# Altium PCB MB1296-STM32_LRA_Disco_revC01.PcbDoc (part 1 of 3)
Units mm, origin at the board's own origin, x right, y up, seen from the top; angles counter-clockwise.
Board outline 65.06 x 95.02 mm, 4 copper layers (Top Layer, GND, VCC, Bottom Layer), stack 1.037 mm thick; 180 components, 129 nets, 710 pads, 1005 vias.
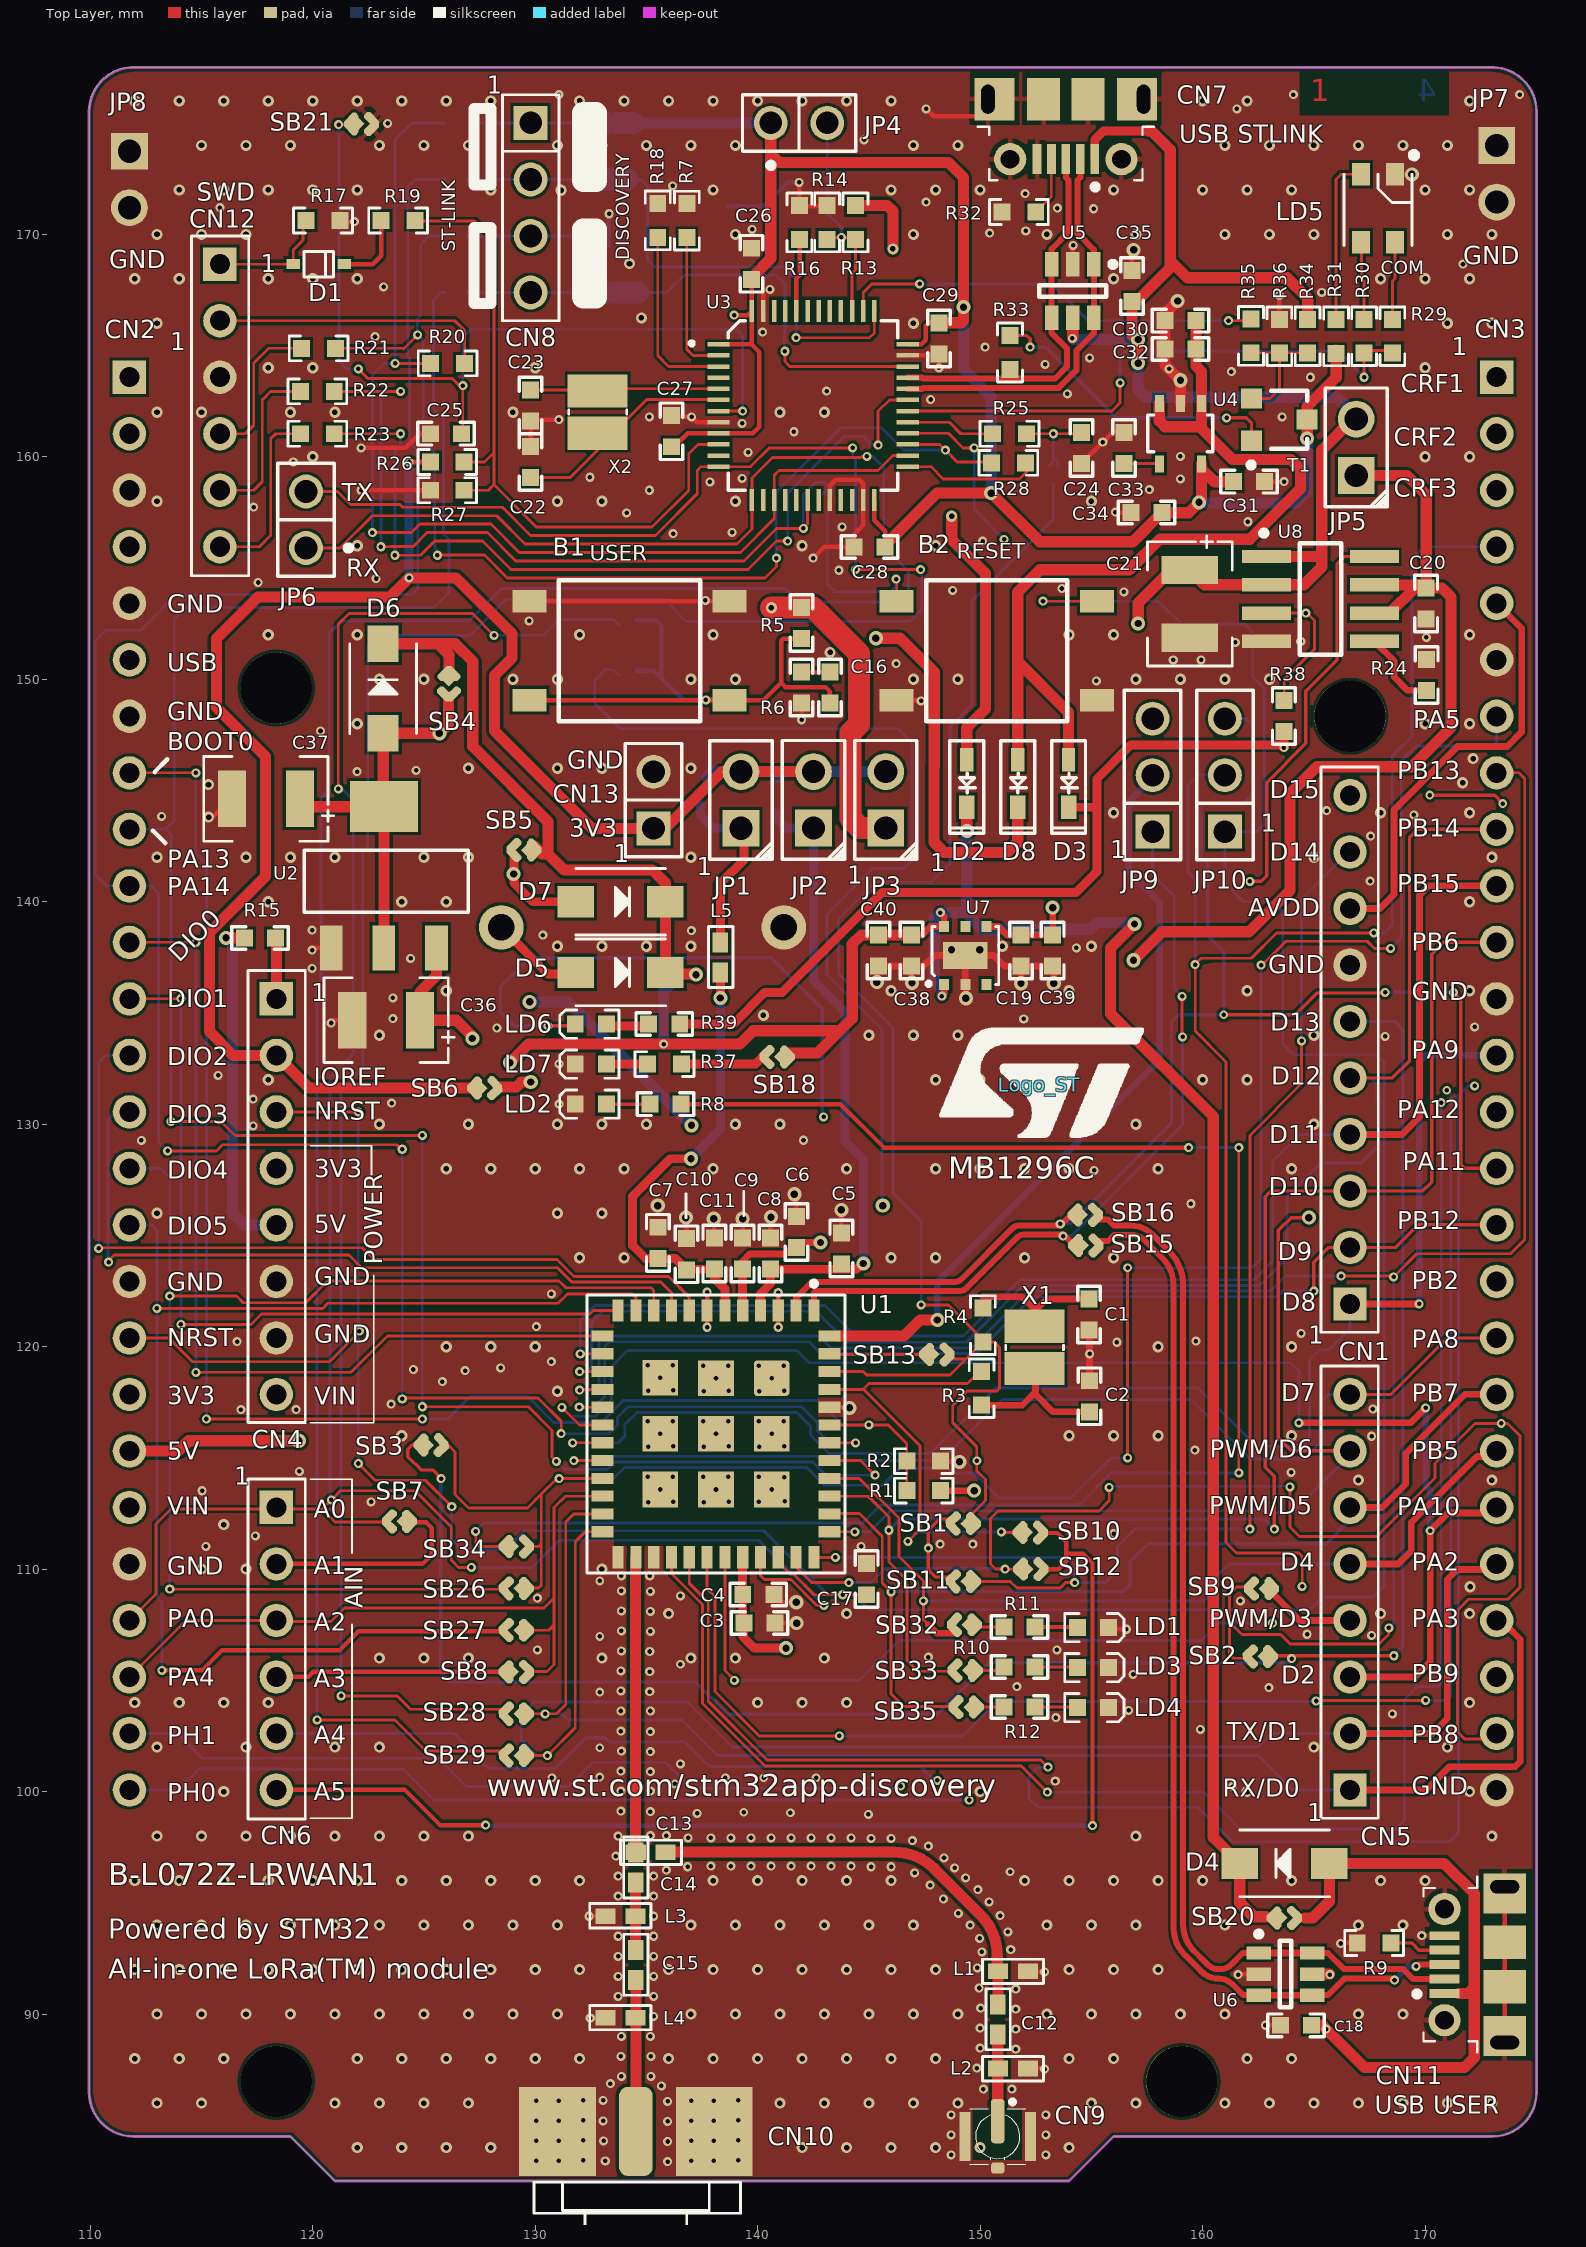
[diagram p0: Top Layer view]
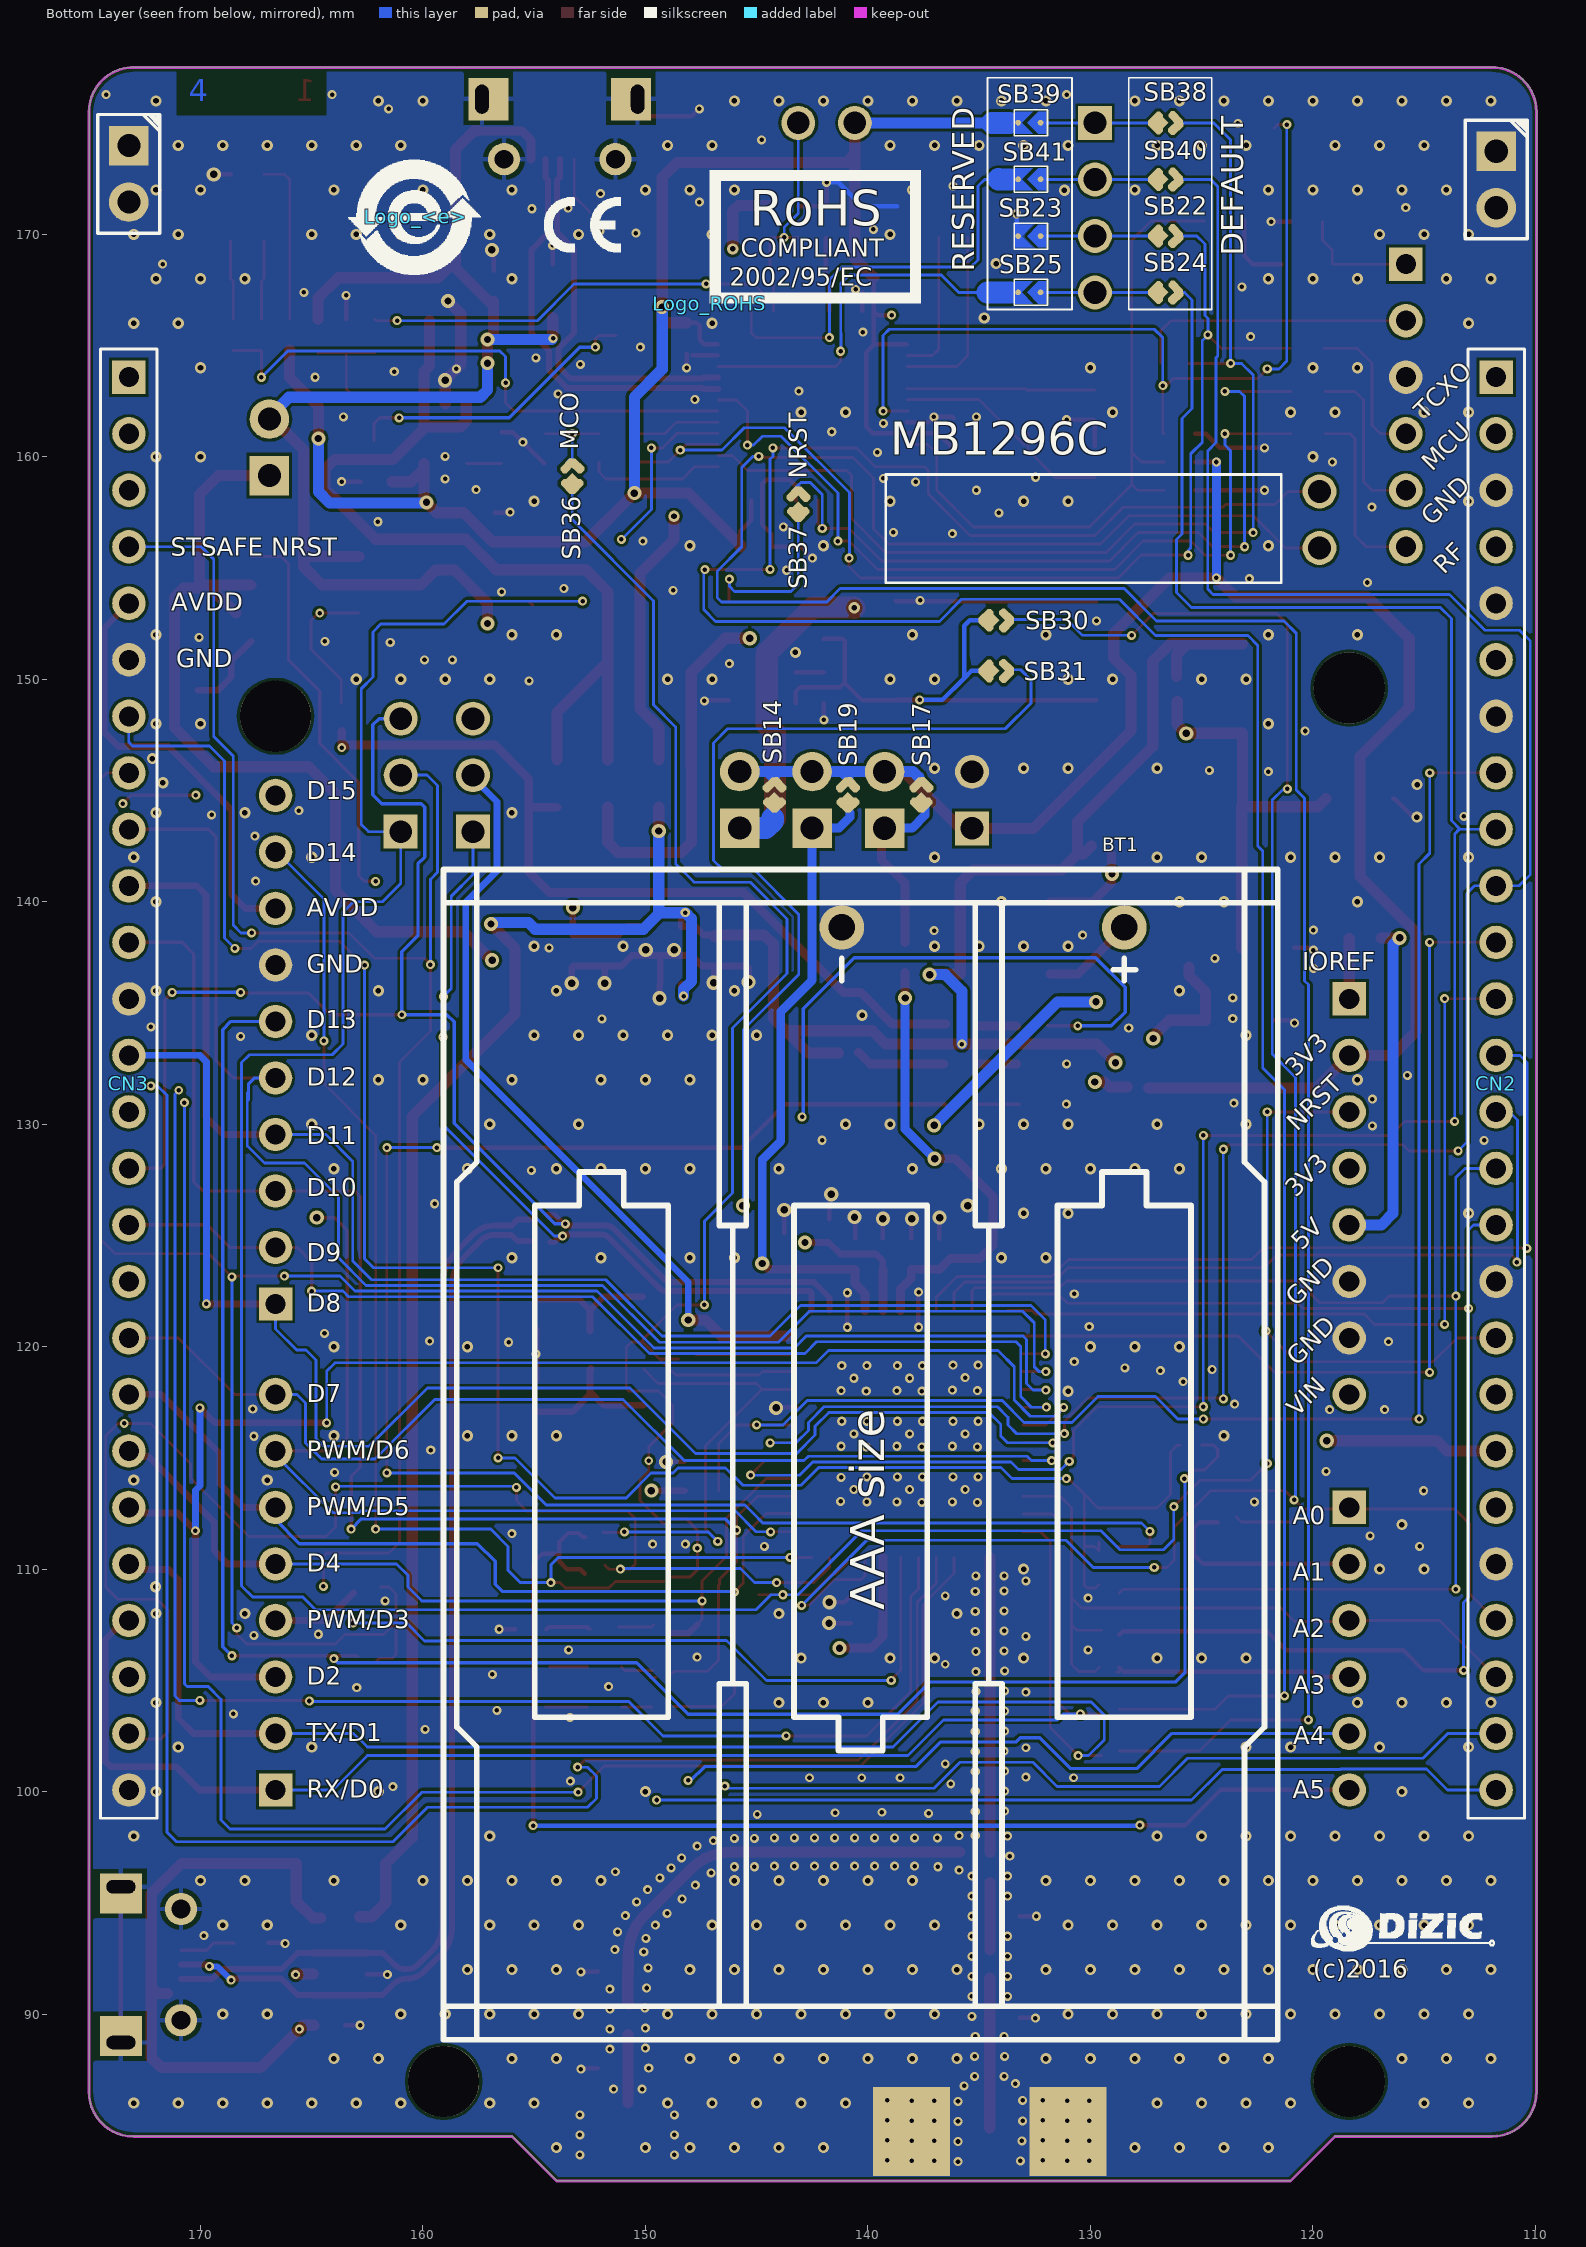
[diagram p1: Bottom Layer view, seen from below]
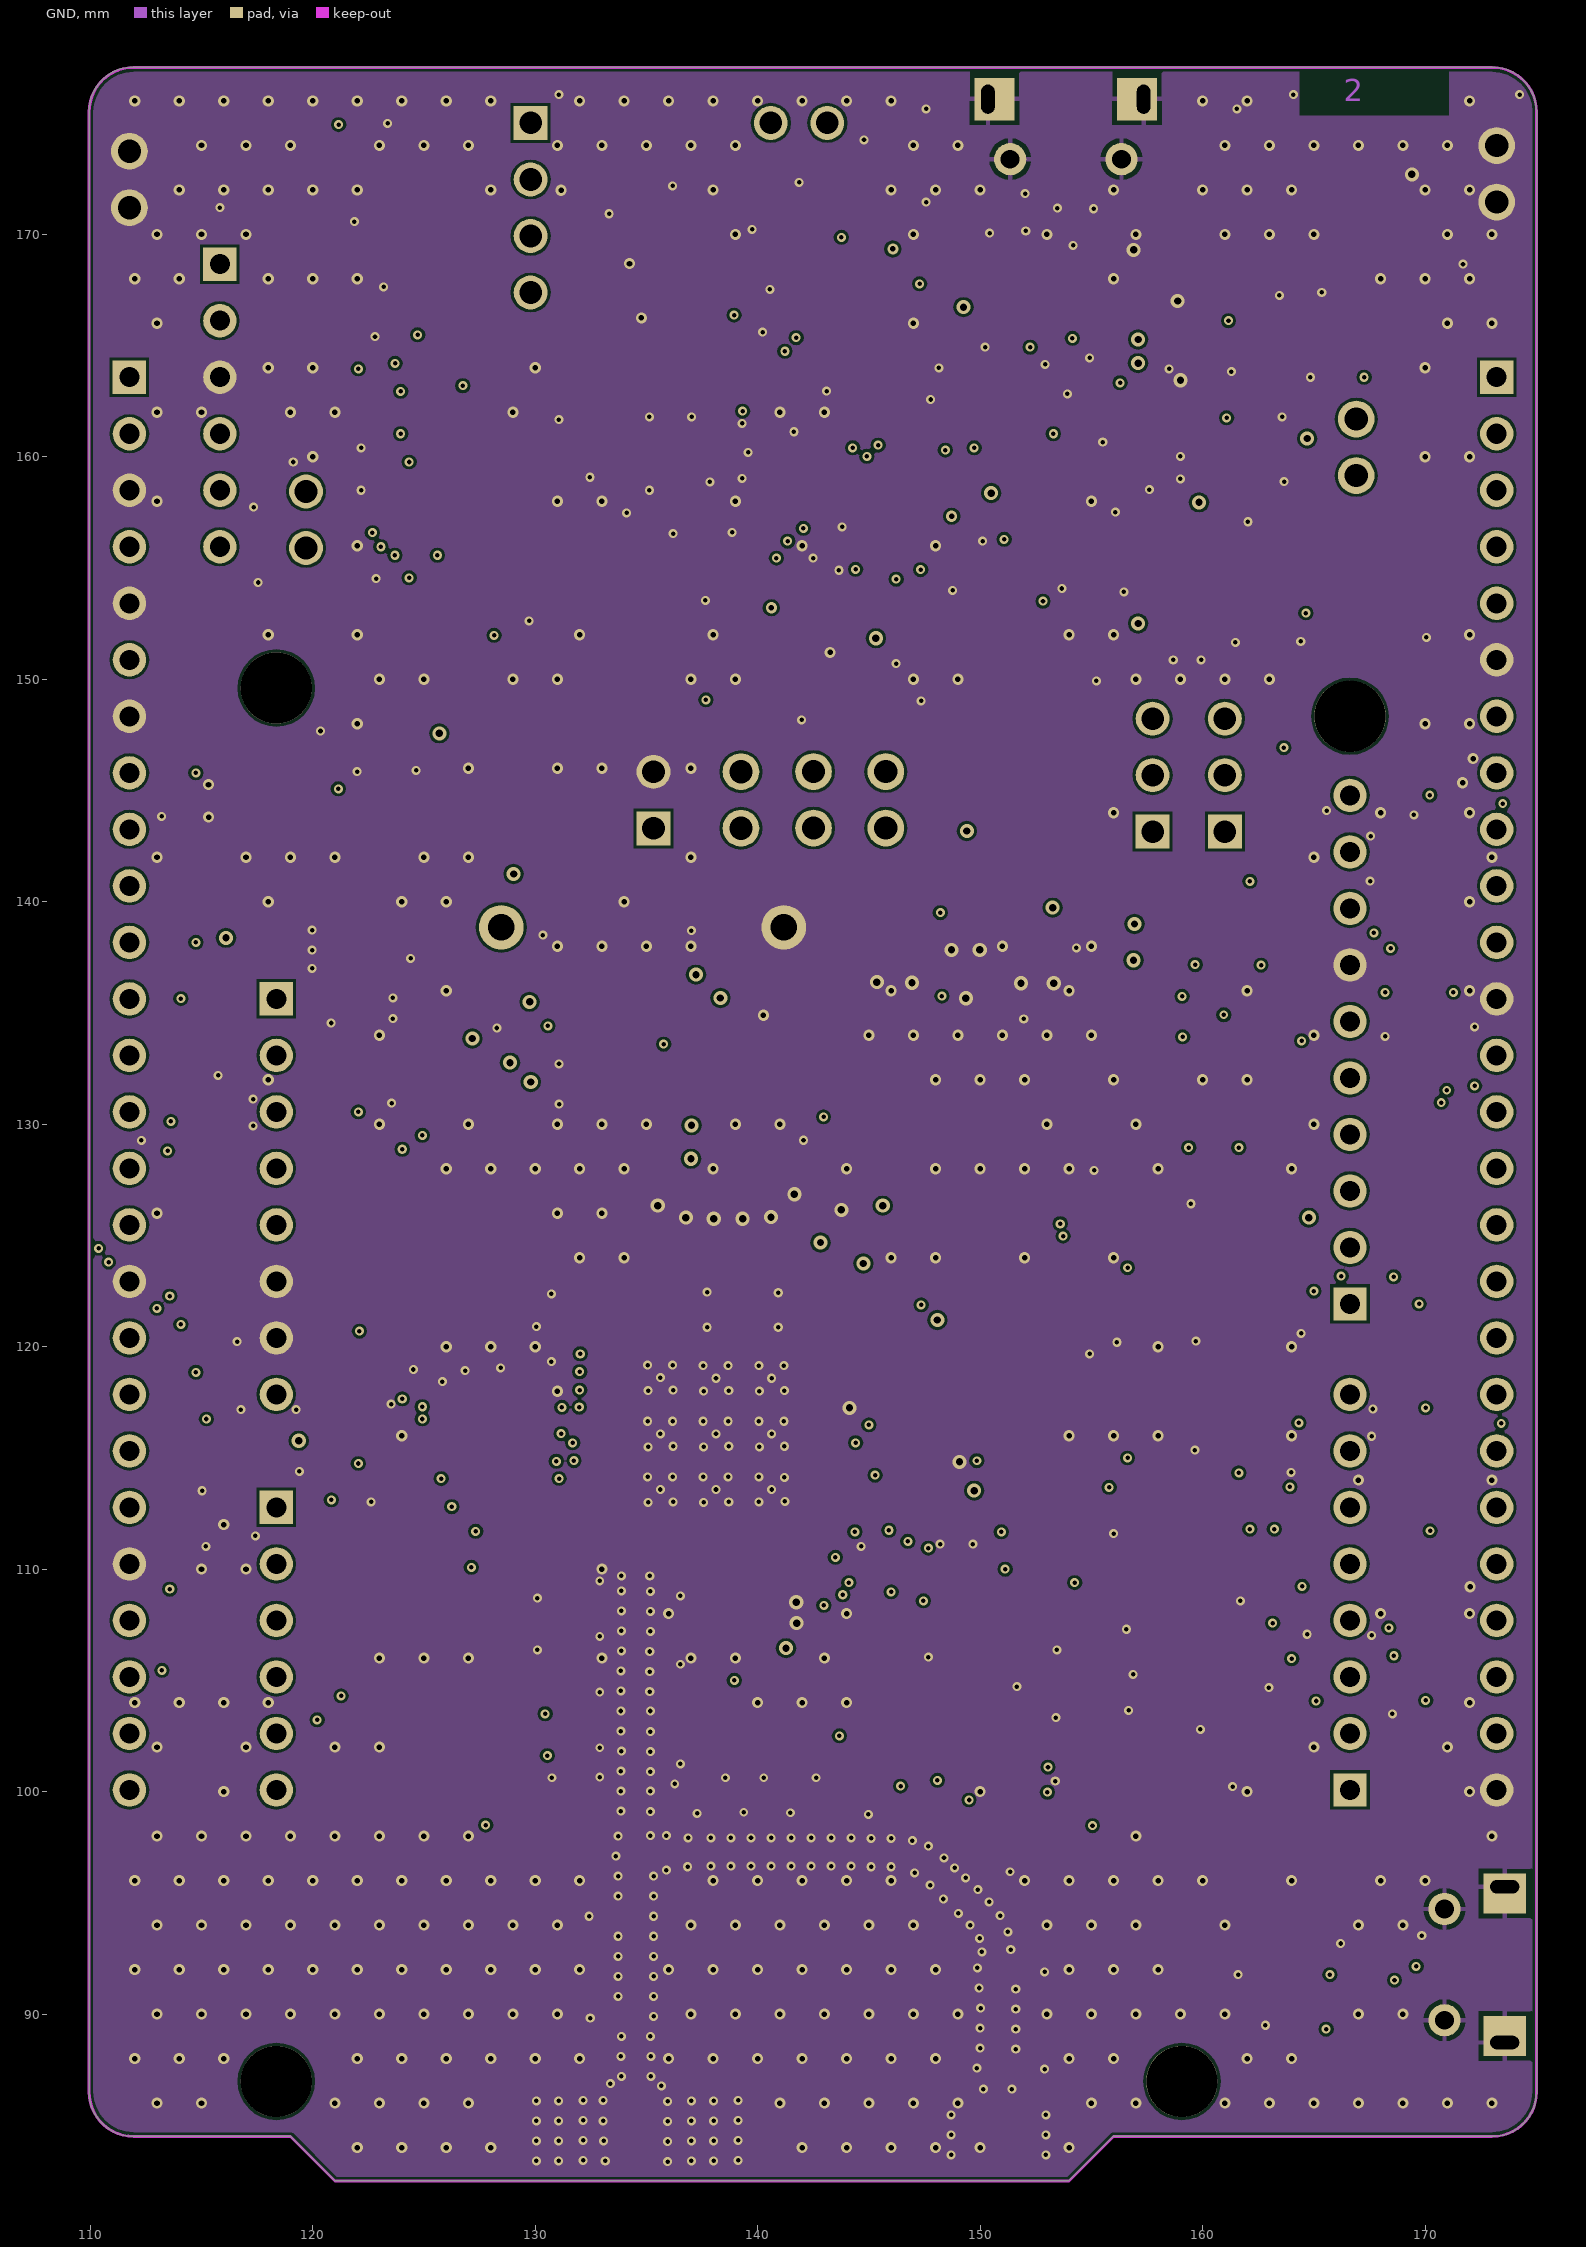
[diagram p2: GND]
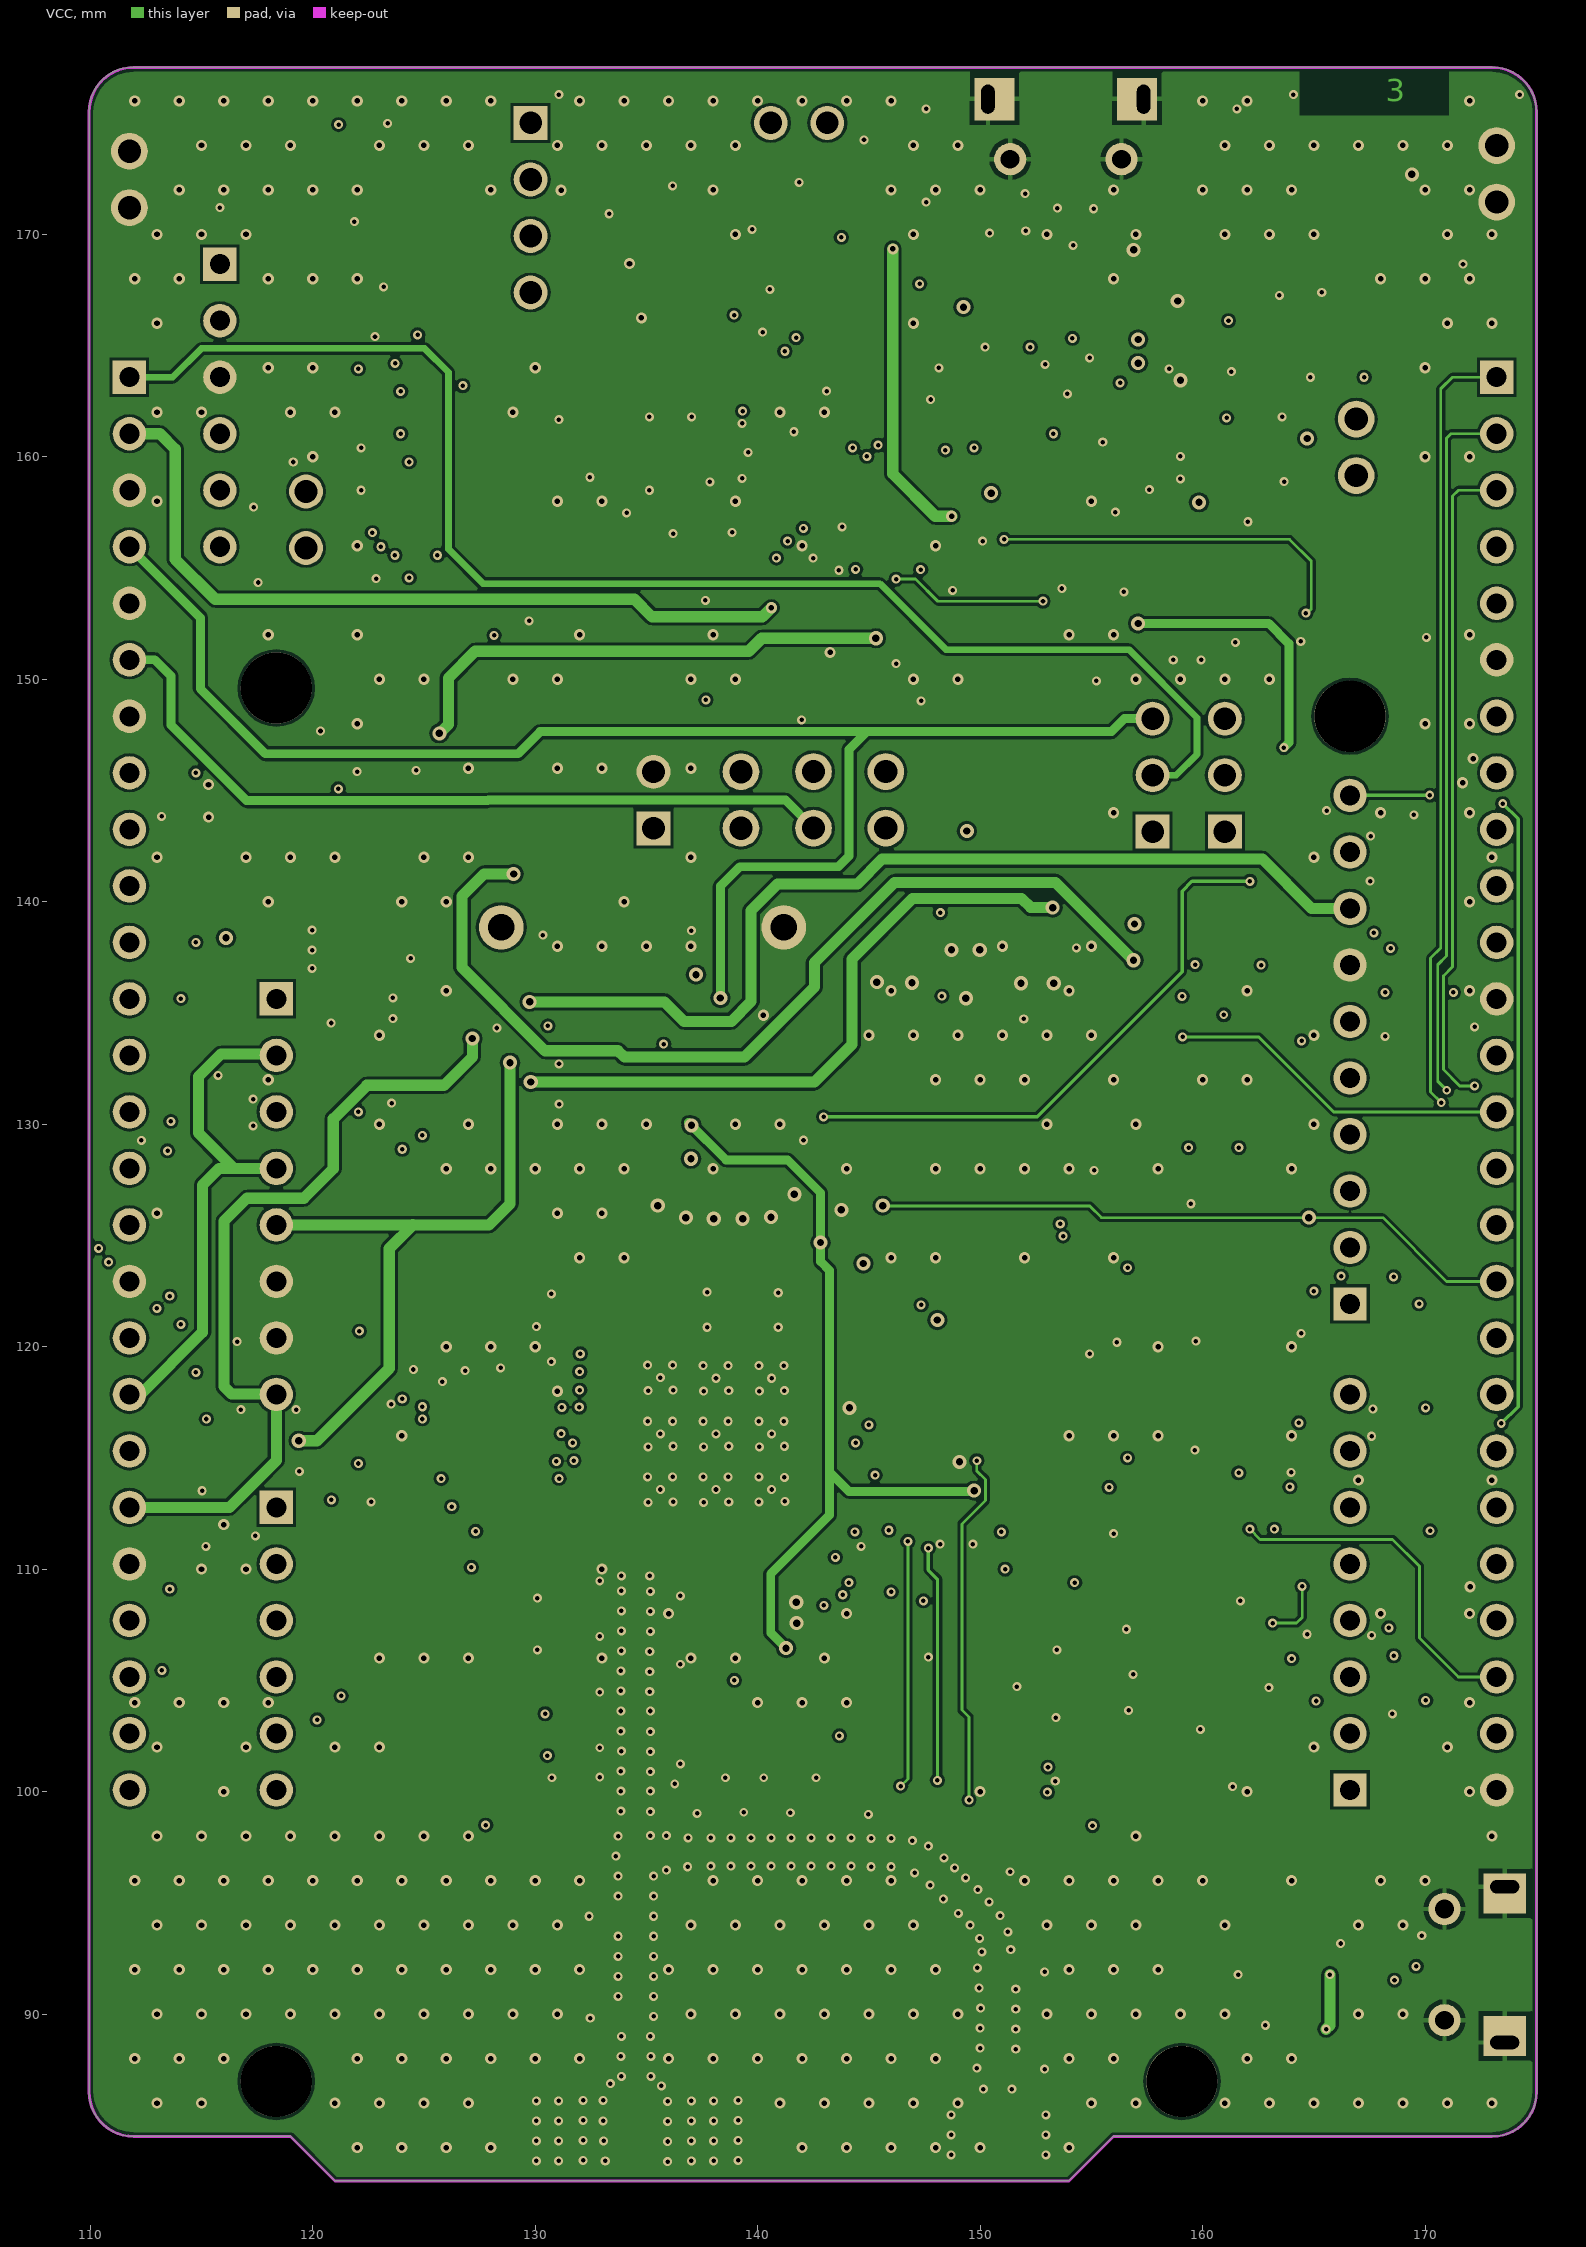
[diagram p3: VCC]

## Layer stack, top to bottom
Top Layer: signal copper 0.0356
Dielectric: core 0.254, FR-4, Dk 4.2
GND: signal copper 0.036
Dielectric: prepreg 0.32, FR-4, Dk 4.8
VCC: signal copper 0.036
Dielectric: core 0.32, FR-4, Dk 4.8
Bottom Layer: signal copper 0.0356

## Board outline
121.005,82.5 119.005,84.5 117.85,84.5 111.955,84.5 cw(c111.955,86.51) 109.945,86.51 109.945,175.515 cw(c111.95,175.515) 111.95,177.52 172.99,177.52 cw(c172.99,175.5) 175.01,175.5 175.01,86.499 cw(c173.011,86.499) 173.011,84.5 156.13,84.5 155.975,84.5 153.975,82.5 121.005,82.5

## Design rules (kind name [scope] priority, off if disabled: settings)
Clearance "Schematic Clearance Constraint" [InNetClass('50R')] p1: gap=0.157
Clearance Clearance_CN10 [InComponent('CN10') vs OnLayer('Keep-Out Layer')] p2: gap=0.08
Clearance [All] p3: gap=0.127
ComponentClearance [All] p1: gap=0 collisioncheckmode=3 verticalgap=0 showdistances=FALSE
DiffPairsRouting [All] p1: maxlimit=0.147 minlimit=0.147 mostfreqgap=0.147 maxuncoupledlength=12.7
HoleSize [All] p1: absolutevalues=TRUE maxlimit=4 minlimit=0.025 maxpercent=80.000 minpercent=20.000
MinimumSolderMaskSliver MinimumSolderMaskSliver_SB [HasFootprint('JP2_SMD') or InComponent('U1') or InComponent('U3') or InComponent('CN11') or InComponent('CN16') or InComponent('CN9')] p1: minsoldermaskwidth=0
MinimumSolderMaskSliver [All] p2: minsoldermaskwidth=0.1
PlaneClearance [All] p1: clearance=0.21
PlaneConnect [All] p1: planeconnectstyle=Direct reliefexpansion=0.21 reliefentries=4 reliefconductorwidth=0.21 reliefairgap=0.21
PolygonConnect [HasFootprint('Molex_1050170001') or InComponent('SB21') or InComponent('SB43')] p1: connectstyle=Relief reliefconductorwidth=0.21 reliefentries=4 polygonreliefangle="90 Angle" airgapwidth=0.21
PolygonConnect PolygonConnect_1 [All] p2: connectstyle=Direct reliefconductorwidth=0.254 reliefentries=4 polygonreliefangle="90 Angle" airgapwidth=0.254
RoutingVias [All] p1: holewidth=0.3 width=0.6 viastyle="Through Hole" minholewidth=0.2 minwidth=0.4 maxholewidth=0.7 maxwidth=1.27
SilkToSilkClearance [All] p1: silktosilkclearance=0.08
SilkToSolderMaskClearance [IsPad] p1: minsilkscreentomaskgap=0 clearancetoexposedcopper=TRUE
SolderMaskExpansion [All] p1: expansion=0.102
Width [All] p1: maxlimit=3 minlimit=0.12 preferedwidth=0.254
20 further rules are at their usual default settings.

## Classes and differential pairs
net class 50R: ANT NetC12_1 NetC12_2 NetC14_2 NetC15_2
component class MB1296-STLINK: C22 C23 C24 C25 C26 C27 C28 C29 C30 C31 C32 C33 C34 C35 CN7 CN8 CN12 D1 D2 D3 D8 JP4 JP6 JP7 JP8 LD5 R7 R13 R14 R16 R17 R18 R19 R20 R21 R22 R23 R25 R26 R27 R28 R29 R30 R31 R32 R33 R34 R35 R36 SB21 SB22 SB23 SB24 SB25 SB36 SB37 SB38 SB39 SB40 SB41 T1 U3 U4 U5 X2
component class MB1296-USB_Antenna: B1 B2 C12 C13 C14 C15 C16 C17 C18 CN9 CN10 CN11 L1 L2 L3 L4 LD1 LD2 LD3 LD4 R5 R6 R8 R9 R10 R11 R12 SB30 SB31 SB32 SB33 SB34 SB35 U6
component class MB1296-LRA_Module: C1 C2 C3 C4 C5 C6 C7 C8 C9 C10 C11 JP9 JP10 R1 R2 R3 R4 SB13 SB15 SB16 SB26 SB27 SB28 SB29 U1 X1
component class MB1296-Connectors: CN1 CN2 CN3 CN4 CN5 CN6 R15 SB1 SB2 SB3 SB7 SB8 SB9 SB10 SB11 SB12
component class MB1296-Power: BT1 C19 C20 C21 C36 C37 C38 C39 C40 CN13 D4 D5 D6 D7 JP1 JP2 JP3 JP5 L5 LD6 LD7 R24 R37 R38 R39 SB4 SB5 SB6 SB14 SB17 SB18 SB19 SB20 U2 U7 U8
net class SX1276_DIO[0..5]: SX1276_DIO0 SX1276_DIO1 SX1276_DIO2 SX1276_DIO3 SX1276_DIO4 SX1276_DIO5
net class PH[0..1]: PH0 PH1
net class PC[0..15]: PC0 PC1 PC2 PC3 PC4 PC5 PC6 PC7 PC8 PC9 PC10 PC11 PC12 PC13 PC14 PC15
net class PB[0..15]: PB0 PB1 PB2 PB3 PB4 PB5 PB6 PB7 PB8 PB9 PB10 PB11 PB12 PB13 PB14 PB15
net class PA[0..15]: PA0 PA1 PA2 PA3 PA4 PA5 PA6 PA7 PA8 PA9 PA10 PA11 PA12 PA13 PA14 PA15
net class CRF[1..3]: CRF1 CRF2 CRF3
differential pair LRA_USB: +LRA_USB_P -LRA_USB_N
differential pair USB_STLK: +"USB_STLK _P" -"USB_STLK _N"

## Components (designator, comment, footprint, x,y, rotation, side; value= is the part's Value field where it differs from the comment)
B1 "USER (Blue)" PB10 134.239,151.286 r180 top locked
B2 "Reset (Black)" PB10 150.749,151.286 r0 top locked
BT1 "3 x AAA Battery Holder" "3 X AAA BATTERY HOLDER" 128.475,138.85 r90 bottom locked
C1 "20 pF" 0603C 154.892,121.446 r90 top
C2 "20 pF" 0603C 154.917,117.771 r270 top
C3 "1uF" 0603C 140.075,107.575 r0 top
C4 "100nF" 0603C 140.027,108.856 r0 top
C5 "10µF" 0603C 143.76,124.41 r270 top
C6 "10µF" 0603C 141.74,125.15 r270 top
C7 "10µF" 0603C 135.51,124.67 r270 top
C8 "100nF" 0603C 140.577,124.181 r90 top
C9 "100nF" 0603C 139.327,124.181 r90 top
C10 "1uF" 0603C 136.802,124.156 r90 top
C11 "100nF" 0603C 138.052,124.181 r90 top
C12 "" 0402 150.791,90.432 r270 top
C13 "" 0402 135.866,97.282 r180 top
C14 "" 0402 134.516,97.257 r270 top
C15 "" 0402 134.516,92.882 r270 top
C16 "100nF" 0603C 143.25,149.625 r90 top
C17 "100nF" 0603C 144.9,109.55 r90 top
C18 "100nF" 0603C 164.2,89.5 r180 top
C19 "100nF" 0603C 151.835,137.81 r270 top
C20 "100nF" 0603C 170.05,153.41 r270 top
C21 "4.7uF(25V)" TAN-B 159.425,153.385 r270 top
C22 "20 pF" 0603C 129.794,159.766 r270 top
C23 "20 pF" 0603C 129.794,162.306 r90 top
C24 "100nF" 0603C 154.559,160.401 r90 top
C25 "100nF" 0603C 125.984,161.036 r180 top
C26 "100nF" 0603C 139.725,168.675 r90 top
C27 "100nF" 0603C 136.125,161.15 r90 top
C28 "100nF" 0603C 145.025,155.95 r180 top
C29 "100nF" 0603C 148.15,165.325 r270 top
C30 "1uF_X5R_0603" 0603C 159.004,166.116 r180 top
C31 "1uF_X5R_0603" 0603C 162.09,158.88 r0 top
C32 "100nF" 0603C 159.004,164.846 r180 top
C33 "10nF_X7R_0603" 0603C 156.464,160.401 r90 top
C34 "100nF" 0603C 157.48,157.49 r180 top
C35 "100nF" 0603C 156.825,167.675 r90 top
C36 "10uF(25V)" TAN-B 123.3,134.675 r180 top
C37 "10uF(25V)" TAN-B 117.9,144.625 r180 top
C38 "1uF_X5R_0603" 0603C 146.91,137.81 r270 top
C39 "1uF_X5R_0603" 0603C 153.26,137.81 r270 top
C40 "100nF" 0603C 145.435,137.81 r270 top
CN1 "Header 10X1_Female" "Header 1x10 Female (Wrapping)" 166.624,121.92 r180 top locked
CN2 "" "HEADER 1X26 (2.54) MALE" 111.76,163.576 r180 bottom locked
CN3 "" "HEADER 1X26 (2.54) MALE" 173.22,163.576 r180 bottom locked
CN4 "Header 8X1_Female" "Header 1x8Female (Wrapping)" 118.364,135.636 r0 top locked
CN5 "Header 8X1_Female" "Header 1x8Female (Wrapping)" 166.624,100.076 r180 top locked
CN6 "Header 6X1_Female" "Header 1x6 Female (Wrapping)" 118.364,112.776 r0 top
CN7 "1050170001" Molex_1050170001 153.85,173.375 r180 top
CN8 "Header 4" SIP4 129.794,175.006 r270 top
CN9 "U.FL-R-SMT" UFL-SMD 150.791,84.507 r0 top
CN10 "SMA" SMA_COMBO_B 134.525,87.65 r90 top
CN11 "1050170001" Molex_1050170001 170.875,92.225 r90 top
CN12 "Header 6X1" "Header 1x6 Female (Wrapping)" 115.824,168.656 r0 top
CN13 "External 3V3" SIP2 135.32,143.3 r90 top
D1 "BAT60JFILM" SOD323/A#1 120.269,168.656 r180 top
D2 "BAT60JFILM" SOD323/A#2 149.403,144.247 r90 top
D3 "BAT60JFILM" SOD323/A#2 153.975,144.247 r90 top
D4 "STPS2L30A" SMA 165.7,96.775 r90 top
D5 "STPS2L30A" SMA 131.825,136.825 r270 top
D6 "STPS2L30A" SMA 123.165,147.567 r0 top
D7 "STPS2L30A" SMA 131.825,140 r270 top
D8 "BAT60JFILM" SOD323/A#2 151.689,144.247 r90 top
JP1 "VDD_RF_LRA" SIP2/2.54#1 139.25,144.575 r180 top
JP2 "VDD_USB_LRA" SIP2/2.54#1 142.51,144.58 r180 top locked
JP3 "VDD_MCU_LRA" SIP2/2.54#1 145.76,144.58 r180 top
JP4 "" SIP2/2.54#2 140.589,175.006 r0 top
JP5 "USB_CHARGER" SIP2/2.54#1 166.903,160.426 r180 top
JP6 "" SIP2/2.54#2 119.7,155.9 r90 top
JP7 "" SIP2/2.54-BOT 173.22,172.72 r0 top
JP8 "" SIP2/2.54-BOT 111.76,172.466 r0 top
JP9 "TCXO Selection" SIP3 157.75,143.15 r90 top
JP10 "RESET source selection" SIP3 161,143.15 r90 top
L1 "" 0402 152.141,91.932 r180 top
L2 "" 0402 152.141,87.557 r180 top
L3 "" 0402 133.166,94.407 r0 top
L4 "" 0402 133.166,89.832 r0 top
L5 "BLM15HG102SN1D" 0402 138.325,138.175 r270 top
LD1 "Green" 0603D 155.075,107.375 r0 top
LD2 "Red" 0603D 132.5,130.9 r180 top
LD3 "Blue" 0603D 155.075,105.575 r0 top
LD4 "Red" 0603D 155.075,103.775 r0 top
LD5 "LD_BICOLOR_CMS" "LED SMD HSMF-A201-A00J1" 168.644,172.696 r180 top
LD6 "Red" 0603D 132.5,134.5 r180 top
LD7 "Red" 0603D 132.5,132.7 r180 top
Logo_<e> "Comment" SYMBOL_RoHS_China 160.32,170.8 r180 bottom
Logo_ROHS "Comment" SYMBOL_RoHS 147.11,166.89 r180 bottom
Logo_ST "Comment" LOGO_ST_Size3 152.65,131.78 r0 top
R1 "0R_0603" 0603 146.703,113.531 r0 top
R2 "100K" 0603 148.227,114.856 r180 top
R3 "0R_0603" 0603 150.07,117.37 r90 top
R4 "0R_0603" 0603 150.12,121.73 r270 top
R5 "4K7" 0603R 141.975,152.525 r270 top
R6 "100R" 0603R 141.975,149.625 r90 top
R7 "10K" 0603 136.814,169.853 r90 top
R8 "510R" 0603R 135.85,130.9 r0 top
R9 "100K" 0603 166.95,93.2 r0 top
R10 "680R" 0603R 151.775,105.6 r180 top
R11 "510R" 0603R 151.775,107.4 r180 top
R12 "680R" 0603R 151.775,103.8 r180 top
R13 "2K7" 0603 144.4,171.3 r270 top
R14 "4K7" 0603 143.125,169.775 r90 top
R15 "10K" 0603R 117.625,138.375 r180 top
R16 "100K" 0603 141.875,169.775 r90 top
R17 "10K" 0603 121.225,170.625 r180 top
R18 "10K" 0603 135.509,169.862 r90 top
R19 "100" 0603 124.6,170.625 r180 top
R20 "22" 0603 125.3,164.2 r0 top
R21 "22" 0603 121.025,164.875 r180 top
R22 "22" 0603 120.968,162.941 r180 top
R23 "22" 0603 120.968,161.036 r180 top
R24 "2K2" 0603R 170.07,150.2 r270 top
R25 "100" 0603 152.082,161.036 r180 top
R26 "4K7" 0603 125.285,159.766 r0 top
R27 "4K7" 0603 125.285,158.496 r0 top
R28 "100" 0603 152.03,159.73 r180 top
R29 "100" 0603 168.529,166.179 r270 top
R30 "100" 0603 167.259,166.179 r270 top
R31 "0" 0603 166,166.175 r270 top
R32 "100K" 0603 150.975,171 r0 top
R33 "1K5" 0603 151.339,165.451 r270 top
R34 "10K" 0603 164.719,166.179 r270 top
R35 "100" 0603 162.175,166.2 r270 top
R36 "36K" 0603 163.449,166.179 r270 top
R37 "1K_5%_0603" 0603 135.05,132.7 r0 top
R38 "10K" 0603R 163.65,148.35 r90 top
R39 "1K" 0603R 135.8,134.5 r180 top
SB1 "Circuit Breaker" JP2_SMD 149.248,112.047 r0 top
SB2 "Circuit Breaker" JP2_SMD 162.6,106.075 r0 top
SB3 "Circuit Breaker" JP2_SMD 125.32,115.58 r180 top
SB4 "Circuit Breaker" JP2_SMD 126.125,149.8 r90 top
SB5 "Circuit Breaker" JP2_SMD 129.5,142.325 r0 top
SB6 "Circuit Breaker" JP2_SMD 127.725,131.625 r180 top
SB7 "Circuit Breaker" JP2_SMD 123.9,112.15 r0 top
SB8 "Circuit Breaker" JP2_SMD 129.15,105.385 r180 top
SB9 "Circuit Breaker" JP2_SMD 162.65,109.125 r0 top
SB10 "Circuit Breaker" JP2_SMD 152.25,111.65 r180 top
SB11 "Circuit Breaker" JP2_SMD 149.248,109.447 r0 top
SB12 "Circuit Breaker" JP2_SMD 152.275,110 r180 top
SB13 "Circuit Breaker" JP2_SMD 148.052,119.656 r180 top
SB14 "Circuit Breaker" JP2_SMD 144.2,144.8 r270 bottom
SB15 "Circuit Breaker" JP2_SMD 154.75,124.55 r180 top
SB16 "Circuit Breaker" JP2_SMD 154.725,125.925 r180 top
SB17 "Circuit Breaker" JP2_SMD 137.6,144.8 r270 bottom
SB18 "Circuit Breaker" JP2_SMD 140.875,133.025 r0 top
SB19 "Circuit Breaker" JP2_SMD 140.9,144.8 r270 bottom
SB20 "Circuit Breaker" JP2_SMD 163.675,94.325 r180 top
SB21 "Circuit Breaker" JP2_SMD 122.19,174.96 r180 top
SB22 "Circuit Breaker" JP2_SMD 126.619,169.926 r0 bottom
SB23 "Circuit Breaker" SB-tiny 132.74,169.92 r0 bottom
SB24 "Circuit Breaker" JP2_SMD 126.619,167.386 r0 bottom
SB25 "Circuit Breaker" SB-tiny 132.74,167.39 r0 bottom
SB26 "Circuit Breaker" JP2_SMD 129.157,109.135 r0 top
SB27 "Circuit Breaker" JP2_SMD 129.157,107.257 r0 top
SB28 "Circuit Breaker" JP2_SMD 129.157,103.5 r0 top
SB29 "Circuit Breaker" JP2_SMD 129.157,101.622 r0 top
SB30 "Circuit Breaker" JP2_SMD 134.225,152.65 r0 bottom
SB31 "Circuit Breaker" JP2_SMD 134.225,150.375 r0 bottom
SB32 "Circuit Breaker" JP2_SMD 149.3,107.5 r0 top
SB33 "Circuit Breaker" JP2_SMD 149.325,105.45 r0 top
SB34 "Circuit Breaker" JP2_SMD 129.15,111.02 r180 top
SB35 "Circuit Breaker" JP2_SMD 149.375,103.8 r0 top
SB36 "Circuit Breaker" JP2_SMD 153.289,159.131 r270 bottom
SB37 "Circuit Breaker" JP2_SMD 143.129,157.861 r270 bottom
SB38 "Circuit Breaker" JP2_SMD 126.619,175.006 r0 bottom
SB39 "Circuit Breaker" SB-tiny 132.74,175.02 r0 bottom
SB40 "Circuit Breaker" JP2_SMD 126.619,172.466 r0 bottom
SB41 "Circuit Breaker" SB-tiny 132.74,172.47 r0 bottom
T1 "9013" SOT-23 163.449,161.671 r270 top
U1 "LRA Module ES0" "Lora Module ES0" 142.527,121.631 r270 top locked
U2 "LD1117S50TR" SOT-223 123.2,141.1 r270 top
U3 "STM32F103CBT6" "QFP48 7X7" 142.494,162.306 r270 top locked
U4 "LD3985M33R" SOT-23-5L 159.004,161.036 r270 top
U5 "USBLC6-2SC6" SOT23-6L 154.164,167.451 r270 top
U6 "USBLC6-2SC6" SOT23-6L 163.725,91.8 r0 top
U7 "LD39050PU33R" DFN6(3X3) 149.335,137.585 r0 top
U8 "ST890CDR" SOIC8_1R27_4R9X6 165.3,153.61 r0 top
X1 "NU/8MHz(12pF)" CRY_NX3225GD_2P 152.45,119.97 r270 top
X2 "8MHz(12pF)" CRY_NX3225GD_2P 132.81,162.01 r90 top

## Footprints (in the part's own frame and the unit in brackets; to place one, negate y for a bottom-side part, rotate by r counter-clockwise, add the part's x,y. Pads: shape width x height; smd on the part's side, far side on the other; paste and mask are expansions set on the pad)
"3 X AAA BATTERY HOLDER" [mm]
  round 2 hole 1.2: 1(0,0) 2(0,12.7)
  silkscreen extent -50,-6.9 2.6,30.6
0402 [mm]
  rect 0.9x0.7 smd: 1(0,0) 2(1.346,0)
  silkscreen extent -0.71,-0.53 2.03,0.56
0603 [mil]
  rect 30x30 smd: 1(0,0) 2(60,0)
  silkscreen extent -22,-22 82,22
0603C [mil]
  rect 30x30 smd: 1(27.5,0) 2(-27.5,0)
  silkscreen extent -50,-20 50,20
0603D [mil]
  rect 30x30 smd: A(-27.5,0) K(27.5,0)
  silkscreen extent -50,-25 55,25
0603R [mil]
  rect 30x30 smd: 1(27.5,0) 2(-27.5,0)
  silkscreen extent -50,-20 50,20
CRY_NX3225GD_2P [mm]
  rect 1.5x2.7 smd mask+0.05: 1(-0.95,0) 2(0.95,0)
  silkscreen extent -0.1,-1.3 0.1,1.3, body extent -1.65,-1.3 1.65,1.3, height 1
DFN6(3X3) [mm]
  rect 2x1.2 smd: 0(0,0)
  rect 0.45x0.5 smd: 1(-0.95,-1.3) 2(0,-1.3) 3(0.95,-1.3) 4(0.95,1.3) 5(0,1.3) 6(-0.95,1.3)
  silkscreen extent -1.71,-1.33 1.5,1.3
"Header 1x6 Female (Wrapping)" [mm] "Header 1x6 Female (Wrapping)"
  rect 1.5x1.5 hole 0.9: 1(0,0)
  round 1.5 hole 0.9: 2(0,-2.54) 3(0,-5.08) 4(0,-7.62) 5(0,-10.16) 6(0,-12.7)
  silkscreen extent -1.27,-14 1.3,1.27
"Header 1x8Female (Wrapping)" [mm] "Header 1x8 Female (Wrapping)"
  rect 1.5x1.5 hole 0.9: 1(0,0)
  round 1.5 hole 0.9: 2(0,-2.54) 3(0,-5.08) 4(0,-7.62) 5(0,-10.16) 6(0,-12.7) 7(0,-15.24) 8(0,-17.78)
  silkscreen extent -1.27,-19.05 1.3,1.27
"Header 1x10 Female (Wrapping)" [mm] "Header 1x10 Female (Wrapping)"
  rect 1.5x1.5 hole 0.9: 1(0,0)
  round 1.5 hole 0.9: 2(0,-2.54) 3(0,-5.08) 4(0,-7.62) 5(0,-10.16) 6(0,-12.7) 7(0,-15.24) 8(0,-17.78) 9(0,-20.32) 10(0,-22.86)
  silkscreen extent -1.27,-24.13 1.3,1.27
"HEADER 1X26 (2.54) MALE" [mm] "Header 1x26 (2.54)  Male Male long pins"
  rect 1.5x1.5 hole 0.9: 1(0,0)
  round 1.5 hole 0.9: 2(0,-2.54) 3(0,-5.08) 4(0,-7.62) 5(0,-10.16) 6(0,-12.7) 7(0,-15.24) 8(0,-17.78) 9(0,-20.32) 10(0,-22.86) 11(0,-25.4) 12(0,-27.94) 13(0,-30.48) 14(0,-33.02) 15(0,-35.56) 16(0,-38.1) 17(0,-40.64) 18(0,-43.18) 19(0,-45.72) 20(0,-48.26) 21(0,-50.8) 22(0,-53.34) 23(0,-55.88) 24(0,-58.42) 25(0,-60.96) 26(0,-63.5)
  silkscreen extent -1.27,-64.77 1.27,1.27
JP2_SMD [mil]
  oct 15x30 smd rot 45: 1(-18,-8) 2(18,7)
  oct 15.75x30 smd rot 135: 1(-18,8)
  rect 26x26 smd rot 45: 2(13,0)
  oct 15x30 smd rot 135: 2(18,-7)
"LED SMD HSMF-A201-A00J1" [mm]
  rect 0.8x1 smd: 1(0,0) 2(0,3.048) 3(1.524,3.048) 4(1.524,0)
  silkscreen extent -0.76,0 2.29,3.2
LOGO_ST_Size3 [mm]
  silkscreen extent -4.5,-2.36 4.7,2.57
"Lora Module ES0" [mm]
  rect 1x0.5 smd: 1(0,0) 2(0,-0.8) 3(0,-1.6) 4(0,-2.4) 5(0,-3.2) 6(0,-4) 7(0,-4.8) 8(0,-5.6) 9(0,-6.4) 10(0,-7.2) 11(0,-8) 12(0,-8.8) 25(11.1,-8.8) 26(11.1,-8) 27(11.1,-7.2) 28(11.1,-6.4) 29(11.1,-5.6) 30(11.1,-4.8) 31(11.1,-4) 32(11.1,-3.2) 33(11.1,-2.4) 34(11.1,-1.6) 35(11.1,-0.8) 36(11.1,0)
  rect 0.5x1 smd: 13(1.15,-9.5) 14(1.95,-9.5) 15(2.75,-9.5) 16(3.55,-9.5) 17(4.35,-9.5) 18(5.15,-9.5) 19(5.95,-9.5) 20(6.75,-9.5) 21(7.55,-9.5) 22(8.35,-9.5) 23(9.15,-9.5) 24(9.95,-9.5) 37(9.95,0.7) 38(9.15,0.7) 39(8.35,0.7) 40(7.55,0.7) 41(6.75,0.7) 42(5.95,0.7) 43(5.15,0.7) 44(4.35,0.7) 45(3.55,0.7) 46(2.75,0.7) 47(1.95,0.7) 48(1.15,0.7)
  rrect20% 1.6x1.6 smd: 49(3.05,-1.9)
  rect 1.6x1.6 smd: 50(5.55,-1.9) 51(8.05,-1.9) 52(3.05,-4.4) 53(5.55,-4.4) 54(8.05,-4.4) 55(3.025,-6.9) 56(5.55,-6.9) 57(8.05,-6.9)
  silkscreen extent -1.3,-10.2 11.8,1.4
Molex_1050170001 [mm]
  rect 0.4x1.35 smd: 1(-1.3,0) 2(-0.65,0) 3(0,0) 4(0.65,0) 5(1.3,0)
  round 1.45 hole 0.85: 6(-2.5,0) 11(2.5,0)
  rect 1.8x1.9 hole 0.6 slot 1.3 at 90 deg copper offset 0.3,0: 7(-3.5,-2.7)
  rect 1.5x1.9 smd: 8(-1,-2.7) 9(1,-2.7)
  rect 1.8x1.9 hole 0.6 slot 1.3 at 90 deg copper offset -0.3,0: 10(3.5,-2.7)
  silkscreen extent -3.95,-1.46 3.95,1.37, body extent -4.1,-5.21 4.1,0.19, height 2.58
PB10 [mil]
  rect 60x40 smd: 1(-177.17,-87.5) 2(-177.17,87.5) 3(177.17,87.5) 4(177.17,-87.5)
  silkscreen extent -125,-125 125,125
"QFP48 7X7" [mm]
  rect 0.2x1 smd: 1(-2.75,-4.25) 2(-2.25,-4.25) 3(-1.75,-4.25) 4(-1.25,-4.25) 5(-0.75,-4.25) 6(-0.25,-4.25) 7(0.25,-4.25) 8(0.75,-4.25) 9(1.25,-4.25) 10(1.75,-4.25) 11(2.25,-4.25) 12(2.75,-4.25) 25(2.75,4.25) 26(2.25,4.25) 27(1.75,4.25) 28(1.25,4.25) 29(0.75,4.25) 30(0.25,4.25) 31(-0.25,4.25) 32(-0.75,4.25) 33(-1.25,4.25) 34(-1.75,4.25) 35(-2.25,4.25) 36(-2.75,4.25)
  rect 1x0.2 smd: 13(4.25,-2.75) 14(4.25,-2.25) 15(4.25,-1.75) 16(4.25,-1.25) 17(4.25,-0.75) 18(4.25,-0.25) 19(4.25,0.25) 20(4.25,0.75) 21(4.25,1.25) 22(4.25,1.75) 23(4.25,2.25) 24(4.25,2.75) 37(-4.25,2.75) 38(-4.25,2.25) 39(-4.25,1.75) 40(-4.25,1.25) 41(-4.25,0.75) 42(-4.25,0.25) 43(-4.25,-0.25) 44(-4.25,-0.75) 45(-4.25,-1.25) 46(-4.25,-1.75) 47(-4.25,-2.25) 48(-4.25,-2.75)
  silkscreen extent -3.81,-5.52 3.81,3.81
SB-tiny [mil] "Pad no components"
  round 10 smd paste-10 mask+0.04: 1(-19.69,0)
  round 10 smd paste-10.08 mask+0.04: 2(20,0)
  Top Layer region: -30,-19.69 -30,19.68 -15.75,19.68 3.94,0 -15.75,-19.69
  Top Layer region: -5.91,19.68 13.78,0 -5.91,-19.69 25,-19.69 25,19.68
  silkscreen extent -32,-23 27,23
SIP2 [mil]
  rect 60x60 hole 40: 1(0,0)
  round 60 hole 40: 2(100,0)
  silkscreen extent -50,-50 150,50
SIP2/2.54#1 [mil]
  rect 65x65 / inner round 65 / far side rect 70x70 hole 41: 1(0,50)
  round 65 / inner round 65 / far side round 70 hole 41: 2(0,-50)
  silkscreen extent -55,-105 55,105
SIP2/2.54#2 [mil]
  round 60 hole 40: 1(0,0) 2(100,0)
  silkscreen extent -50,-80 150,50
SIP2/2.54-BOT [mil]
  rect 65x65 / inner round 65 / far side rect 70x70 hole 41: 1(0,50)
  round 65 / inner round 65 / far side round 70 hole 41: 2(0,-50)
SIP3 [mil]
  rect 60x60 hole 40: 1(0,0)
  round 60 hole 40: 2(100,0) 3(200,0)
  silkscreen extent -50,-50 250,50
SIP4 [mil]
  rect 60x60 hole 40: 1(0,0)
  round 60 hole 40: 2(100,0) 3(200,0) 4(300,0)
  silkscreen extent -50,-50 350,50
SMA [mm]
  rect 1.4x1.64 smd: 1(0,0) 2(0,4.03)
  silkscreen extent -1.5,0 1.5,4.03
SMA_COMBO_B [mm]
  rrect50% 4x1.5 smd: 1(-2.921,0)
  rect 4x2 smd: 2(-2.921,4.25) 2(-2.921,-2.794) 2(-2.921,2.794) 2(-2.921,-4.25)
  rect 4x2 smd far side: 2(-2.921,4.25) 2(-2.921,-2.794) 2(-2.921,2.794) 2(-2.921,-4.25)
  silkscreen extent -14.6,-4.7 -5.21,4.57
SOD323/A#1 [mm]
  rect 0.6x0.45 smd: 1(1.143,0) 2(-1.143,0)
  silkscreen extent -0.67,-0.57 0.67,0.57
SOD323/A#2 [mm]
  rect 1.06x0.7 smd: 1(0,0)
  rect 1.06x0.6 smd: 2(2.14,0)
  silkscreen extent -1.17,-0.76 3,0.76
SOIC8_1R27_4R9X6 [mm] "1.2 A current limited high-side power switch with thermal shutdown"
  rect 2.2x0.6 smd: 1(-2.425,1.905) 2(-2.425,0.635) 3(-2.425,-0.635) 4(-2.425,-1.905) 5(2.425,-1.905) 6(2.425,-0.635) 7(2.425,0.635) 8(2.425,1.905)
  silkscreen extent -2.67,-2.5 0.93,3.08, body extent -2,-2.5 2,2.5, height 1.45
SOT23-6L [mm]
  rect 1.1x0.6 smd: 1(-1.2,0.95) 2(-1.2,0) 3(-1.2,-0.95) 4(1.2,-0.95) 5(1.2,0) 6(1.2,0.95)
  silkscreen extent -1.32,-1.5 0.25,1.93, body extent -0.86,-1.51 0.87,1.52, height 1.25
SOT-23 [mm]
  rect 0.9x0.95 smd: 1(-0.95,-1.25) 2(0.95,-1.25) 3(0,1.25)
  silkscreen extent -1.3,-1.39 2.16,1.25
SOT-23-5L [mil]
  rect 30x16 smd: 1(-53.15,37.4) 2(-53.15,0) 3(-53.15,-37.4) 4(53.15,-37.4) 5(53.15,37.4)
  silkscreen extent -33,-58 32,57
SOT-223 [mil]
  rect 80x40 smd: 1(125,-93) 2(125,0) 3(125,93)
  rect 90x120 smd: 2(-125,0)
  silkscreen extent -48,-141 62,149
SYMBOL_RoHS [mm]
  silkscreen extent 0,0 9.5,6
SYMBOL_RoHS_China [mm]
  silkscreen extent -3.03,-2.62 2.91,2.53
TAN-B [mil]
  rect 50x100 smd: 1(-60,0) 2(60,0)
  silkscreen extent -120,-75 110,75
UFL-SMD [mm] "UFL RF connector SMD"
  rrect50% 0.6x2 smd: 1(0,0.686)
  rect 0.5x2.2 smd: 2(-1.475,0) 2(1.475,0)
  rrect50% 0.6x0.5 smd: 2(0,-1.422)
  silkscreen extent -1.25,-1.25 1.25,1.6, body extent -1.7,-1.55 1.7,1.55, height 1.25

## Part data
B1 B2: library part "SW PUSHBUTTON", "SE PUSHBUTTON"
C1 C2 C22 C23: library part Capacitor_ST, "Capacitor 0603"
C3 C10 C30 C31 C38 C39: library part "CAP SMD 0603  X5R 1µF 25V 10%", "0603  X5R 1µF"
C4 C8 C9 C11 C16 C17 C18 C19 C20 C24 C25 C26 C27 C28 C29 C32 C34 C35 C40: library part CAP, "Capacitor 100nF"
C5 C6 C7: library part CAP_C0805C106K8RACTU, "Capacitor SMD 0805 10000000pF X7R 10V +/-10%"
C12 C13 C14 C15: library part "CAP SMD 0402 NPO 18PF 16V 5%", "0402"
C21 C36 C37: library part "Cap Pol1", "Polarized Capacitor (Radial)"
C33: library part "CAP SMD 0603  X7R 10000PF 50V 10%", "0603  X7R 10NF"
CN1: "Header, 10-Pin, Single row,female"
CN2 CN3: library part CON_SLW-126-01-T-S, "Connector header 26x1 2.54mm female"
CN4 CN5: "Header, 8-Pin, Single row,female"
CN6: "Header, 6-Pin, Single row,female"
CN8: "Header, 4-Pin, Single row"
CN9: library part UFL
CN12: "Header, 6-Pin, Single row"
CN13: library part "Header 2", "Header 2"
JP1 JP2 JP3 JP4 JP5 JP6 JP7 JP8: library part JP2
JP9 JP10: library part "Header 3", "Header 3"
L1 L2 L3 L4: library part BLM15HG102SN1D
LD1 LD2 LD3 LD4 LD6 LD7: library part LED2, "Typical RED, GREEN, YELLOW, AMBER GaAs LED"
LD5: "Bicolor Led"
R1 R3 R4: library part "RES SMD 0603 0R 50V 0.1W", "0603 0R 50V 0.1W"
R2 R9 R16 R32: library part "RES SMD 0603 100K 75V 5% 0.1W", "0603 100K 75V 5% 0.1W"
R5 R6 R8 R10 R11 R12 R14 R26 R27: library part res1_4, "Resistor"
R7 R15 R17 R18 R34 R38 R39: library part Resistor_ST, "Resistor 0603"
R13 R36: library part Res1, "Resistor"
R19 R20 R21 R22 R23 R25 R28 R29 R30 R35: library part Res1_1, "Resistor 0603"
R24: library part Res1_2, "Resistor"
R31: library part Resistor_ST, "Resistor 0402 / 0603 / 0805"
R33: library part "RES SMD 0603 100K 75V 5% 0.1W", "0603 1K5 75V 5% 0.1W"
R37: library part "RES SMD 0603 1K 50V 5% 0.063W", "0603 1K 50V 5% 0.063W"
T1: library part NPN, "NPN Bipolar Transistor"
U2: library part LD1117
U3: "Medium-density performance line ARM-based 32-bit MCU with 64KB Flash"
U4: "Ultra low drop-low noise BiCMOS voltage, regulators low ESR capacitors compatible"
U7: library part LD39050P
X1 X2: library part XTAL, "Crystal Oscillator"

## Free pads (board coordinates)
  round 3.2 hole 3.2 unplated: 0(118.364,86.975) 0(118.364,149.606) 0(159.07,86.975) 0(166.624,148.336)
  round 0.508 on Mech3: 1(35.569,38.687)
  round 0.508 on Mech2: 1(269.959,38.687)

## Via types
v1: diameter 0.406, hole 0.203, Top Layer to Bottom Layer, tented both sides, 496 vias
v2: diameter 0.5, hole 0.25, Top Layer to Bottom Layer, tented both sides, 413 vias
v3: diameter 0.635, hole 0.33, Top Layer to Bottom Layer, tented both sides, 53 vias
v4: diameter 0.4, hole 0.203, Top Layer to Bottom Layer, tented both sides, 43 vias

## Nets (pads, with @x,y where several pads share a name; then routed paths per layer and width w, separated by ;. In a path a pad name is that pad's centre, name@x,y a point inside that pad or via, vN(x,y) a via of type N, cw(c..) or ccw(c..) an arc to the next point about the centre after c; other vN are vias at no path point)
+3V3: CN2.19 CN4.2 CN4.4 CN13.1 JP1.2 JP2.2 JP3.2 R26.1 SB6.2 SB14.1 SB17.1 SB19.1 | length 110
  Top Layer w0.203: v1(124.333,159.766) R26.1@125.285,159.766
  Top Layer w0.5: SB6.2@127.395,131.625 119.835,131.625 CN4.2@118.364,133.096 116.424,133.096 115.36,134.16 115.36,138.617 117.88,141.137 117.88,146.52 115.67,148.73 115.67,151.83 117.54,153.7 123.474,153.7 v1(124.333,154.559) 126.441,154.559 128.95,152.05 128.95,150.95 128.175,150.175 128.175,147.675 132.55,143.3 CN13.1@135.32,143.3 135.84,143.3 138.39,145.85 JP2.2@142.51,145.85
  VCC w0.5: CN2.19@111.76,117.856 112.256,117.856 115.05,120.65 115.05,127.275 115.791,128.016 116.459,128.016 ; CN4.4@118.364,128.016 116.459,128.016 ; CN4.2@118.364,133.096 118.31,133.15 115.879,133.15 114.87,132.141 114.87,129.605 116.459,128.016
  Bottom Layer w0.4: v1(124.333,154.559) v1(124.333,159.766)
  Bottom Layer w0.5: 137.7,145.6 137.723,145.6 137.973,145.85 139.22,145.85 141.05,145.85 ; 140.9,145.6 141.05,145.75 141.05,145.85 ; JP2.2@142.51,145.85 141.05,145.85 ; 144.2,145.6 144.263,145.6 144.513,145.85 ; JP3.2@145.76,145.85 144.513,145.85 ; 141.05,145.85 144.513,145.85
+3V3_ST_LINK: C26.2 C27.2 C28.2 C29.2 C31.2 C34.2 JP4.1 R31.2 SB39.2 T1.3 U3.1 U3.9 U3.24 U3.36 U3.48 U4.5 | length 90
  Top Layer w0.203: C27.2@136.144,160.338 136.863,161.056 U3.9@138.244,161.056 139.781,161.056 140.081,161.356 140.081,164.698 139.744,165.035 ; U3.1@138.244,165.056 139.723,165.056 139.744,165.035 ; v1(138.938,166.37) 139.558,166.37 U3.48@139.744,166.556 ; C26.2@139.744,168.065 U3.48@139.744,166.556 ; U3.24@145.244,158.056 145.244,157.143 145.732,156.654 145.732,156.04 C28.2@145.732,156.009 ; U3.36@146.744,165.056 147.364,165.056 147.564,165.256 147.564,165.882 147.706,166.024 C29.2@148.15,166.024 ; 139.744,165.035 U3.48@139.744,166.556
  Top Layer w0.508: C26.2@139.744,168.065 140.589,168.91 140.589,173.609 ; JP4.1@140.589,175.006 140.589,173.609 ; C28.2@145.732,155.956 C28.2@145.732,156.009 ; C28.2@145.732,156.04 148.061,158.369 v3(150.495,158.369) 152.684,156.18 156.869,156.18 C34.2@158.178,157.49 159.38,157.49 v3(159.84,157.95) 159.954,158.064 U4.5@159.954,159.456 ; C29.2@148.15,166.024 149.149,166.024 149.25,166.125 v3(149.25,166.729) 149.25,172.55 148.572,173.228 140.97,173.228 140.589,173.609 ; U4.5@159.954,159.686 U4.5@159.954,159.456 ; C31.2@161.392,158.88 160.53,158.88 U4.5@159.954,159.456 ; v3(164.699,160.821) T1.3@164.699,161.671 164.699,162.261 166,163.562 R31.2@166,164.651 ; R31.2@165.989,164.651 R31.2@165.989,164.782
  Bottom Layer w0.508: 134.417,175.006 JP4.1@140.589,175.006 ; v3(149.25,166.729) 149.25,163.932 150.495,162.687 v3(150.495,158.369) ; v3@159.84,157.924 164.195,157.924 164.699,158.429 v3(164.699,160.821)
  Bottom Layer w1: 133.655,175.006 134.417,175.006
+5V: C38.2 C40.2 CN2.20 CN4.5 D2.1 D4.2 D5.2 D6.2 D7.2 R15.1 SB4.2 SB5.2 SB18.2 SB20.2 U7.1 U7.6 | length 179.4
  Top Layer w0.3: C38.2@146.885,138.509 C38.2@146.91,138.509 147.383,138.509 147.76,138.885 U7.6@148.385,138.885 148.385,139.335 v1(148.21,139.51) ; v1(148.285,135.76) 148.385,135.86 U7.1@148.385,136.285
  Top Layer w0.5: v3(116.1,138.375) R15.1@116.926,138.375 ; v3(128.87,132.77) 129.7,133.6 v1(135.775,133.6) 139.2,133.6 139.8,134.2 143.675,134.2 143.682,134.193 ; SB18.2@141.332,133.203 142.693,133.203 143.682,134.193 ; C38.2@146.885,138.444 146.821,138.509 C40.2@145.435,138.509 144.669,138.509 144.25,138.09 144.25,134.76 143.682,134.193
  Top Layer w0.508: CN2.20@111.76,115.316 113.966,115.316 114.425,115.775 v3(119.375,115.775) ; D6.2@123.165,151.597 125.628,151.597 ; SB4.2@126.125,150.13 126.125,151.1 125.628,151.597 ; SB5.2@129.957,142.503 130.313,142.147 130.578,142.147 ; v3@137.2,136.75 135.855,136.75 D7.2@135.855,140 135.855,140.845 135.275,141.425 131.3,141.425 130.578,142.147 ; v3(149.403,143.18) D2.1@149.403,144.247 ; v3(156.94,139) 155.86,137.92 155.86,134.965 160.484,130.341 160.484,97.942 D4.2@161.661,96.766 ; D4.2@161.67,96.775 161.67,95.005 162.3,94.375 162.85,94.375 ; 125.628,151.597 126.403,151.597 127.2,150.8 127.2,146.975 130.578,143.597 130.578,142.147
  VCC w0.5: CN4.5@118.364,125.476 124.5,125.476 127.926,125.476 128.87,126.42 v3(128.87,132.77)
  VCC w0.508: v3(119.375,115.775) 120.191,115.775 123.441,119.025 123.441,124.417 124.5,125.476
  Bottom Layer w0.5: v3(116.1,138.375) 116.4,138.075 116.4,126 116.924,125.476 CN4.5@118.364,125.476 ; v1(135.775,133.6) 135.775,135.975 136.525,136.725 v3(137.225,136.725) ; v1(148.21,139.51) 147.935,139.235 147.935,136.42 148.285,136.07 v1(148.285,135.76)
  Bottom Layer w0.508: v1(148.21,139.51) 149.35,139.51 ; v3(149.403,143.18) 149.403,139.563 149.35,139.51 ; v3(156.94,139) 156.87,139.07 155.26,139.07 154.96,138.77 150.09,138.77 149.35,139.51
A4: CN6.5 SB1.1 SB11.1 | length 46.7
  Top Layer w0.15: SB1.1@148.788,112.253 148.153,112.253 147.66,111.76 147.66,109.98 147.989,109.65 SB11.1@148.791,109.65
  VCC w0.15: v1(147.67,110.95) 147.67,109.96 148.08,109.55 v1(148.08,100.51)
  Bottom Layer w0.15: CN6.5@118.364,102.616 126.334,102.616 127.91,101.04 130.89,101.04 132.28,102.43 133.15,102.43 133.35,102.23 136.74,102.23 137.84,101.13 147.34,101.13 147.96,100.51 v1(148.08,100.51)
A5: CN6.6 SB10.1 SB12.1 | length 54.2
  Top Layer w0.2: CN6.6@118.364,100.076 124.149,100.076 125.725,98.5 v1(127.775,98.5) ; SB10.1@152.707,111.447 152.822,111.447 153,111.625 153.475,111.625 153.875,111.225 153.875,110.7 ; SB12.1@152.732,109.797 152.935,110 153.525,110 153.875,110.35 153.875,110.7 ; v1(155.05,98.475) 155.05,110.275 154.625,110.7 153.875,110.7
  Bottom Layer w0.2: v1(127.775,98.5) 127.8,98.475 v1(155.05,98.475)
AIN_1: R19.1 R26.2 R27.2 U3.10 | length 31.2
  Top Layer w0.127: R19.1@124.875,170.6 127.275,170.6 128.143,169.732 128.143,160.193 ; R27.2@126.682,158.496 127.889,158.496 128.143,158.75 ; R26.2@126.682,159.766 127.716,159.766 128.143,160.193 ; U3.10@138.244,160.556 137.315,160.556 136.906,160.147 136.906,158.496 135.255,156.845 130.048,156.845 128.143,158.75 ; 128.143,158.75 128.143,160.193
ANT: C13.2 C14.1 U1.26 | length 13.3
  Top Layer w0.5: C14.1@134.516,97.257 U1.26@134.516,110.531
BOOT0: CN2.8 R1.1 R2.2 U1.43 | length 70.3
  Top Layer w0.127: CN2.8@111.76,145.796 v1(114.746,145.796) ; v1(115.225,116.75) v1(124.925,116.75) ; U1.43@143.227,116.481 v1(145,116.481) 145.872,116.481 146.703,115.65 R2.2@146.703,114.856 R1.1@146.703,113.531
  Bottom Layer w0.127: CN2.8@111.146,145.796 CN2.8@111.76,145.796 ; v1(114.746,145.796) 114.746,142.179 115.225,141.7 v1(115.225,116.75) ; v1(124.925,116.75) 126.07,116.75 127.08,117.76 129.665,117.76 130.825,116.6 132.984,116.6 133.959,117.575 142.725,117.575 143.819,116.481 v1(145,116.481)
CRF1: CN3.1 U1.28 | length 109.4
  Top Layer w0.127: U1.28@136.127,110.531 136.127,109.806 137.527,108.406 137.527,103.956 140.333,101.15 151.85,101.15 v1(153.025,99.975)
  VCC w0.127: v4(170.725,130.975) 170.25,131.45 170.25,137.47 170.706,137.926 170.706,163.056 171.226,163.576 CN3.1@172.725,163.576
  Bottom Layer w0.127: v1(153.025,99.975) 160.05,99.975 161.7,98.325 168.675,98.325 169.075,98.725 169.075,104.15 169.65,104.725 170.6,104.725 170.725,104.85 v4(170.725,130.975)
CRF2: CN3.2 U1.30 | length 99.6
  Top Layer w0.127: U1.30@137.727,110.531 137.727,109.123 138.075,108.775 138.075,104.5 140.069,102.506 v1(143.677,102.506) ; v1@165.125,104.1 v1(170.025,104.1)
  VCC w0.127: v4(170.975,131.525) 170.571,131.929 170.571,137.171 170.96,137.56 170.96,160.835 171.161,161.036 CN3.2@172.725,161.036
  Bottom Layer w0.127: v1(143.677,102.506) 149.206,102.506 150.75,104.05 165.075,104.05 v1(165.1,104.075) ; v1(170.025,104.1) 170.95,104.1 171.15,104.3 171.15,131.35 v4(170.975,131.525)
CRF3: CN3.3 U1.29 | length 109
  Top Layer w0.127: U1.29@136.927,110.531 136.927,109.365 137.781,108.511 137.781,104.061 140.417,101.425 152.725,101.425 v1@153.125,101.025
  VCC w0.127: v4(172.225,131.725) 171.555,131.725 170.825,132.455 170.825,136.67 171.23,137.075 171.23,158.23 171.496,158.496 CN3.3@172.725,158.496
  Bottom Layer w0.127: v1(153.05,101.1) 152.6,101.1 152.2,100.7 152.2,99.7 152.6,99.3 159.8,99.3 161.35,97.75 171.075,97.75 171.5,98.175 171.5,131.3 171.925,131.725 v4(172.225,131.725)